# Altium PCB SiLPA.PcbDoc (part 4 of 10)
Units mm, origin at the board's own origin, x right, y up, seen from the top; angles counter-clockwise.
Board outline 222.36 x 100 mm, 4 copper layers (L1, P2, L3, L4), stack 1.598 mm thick; 583 components, 330 nets, 1692 pads, 1781 vias.
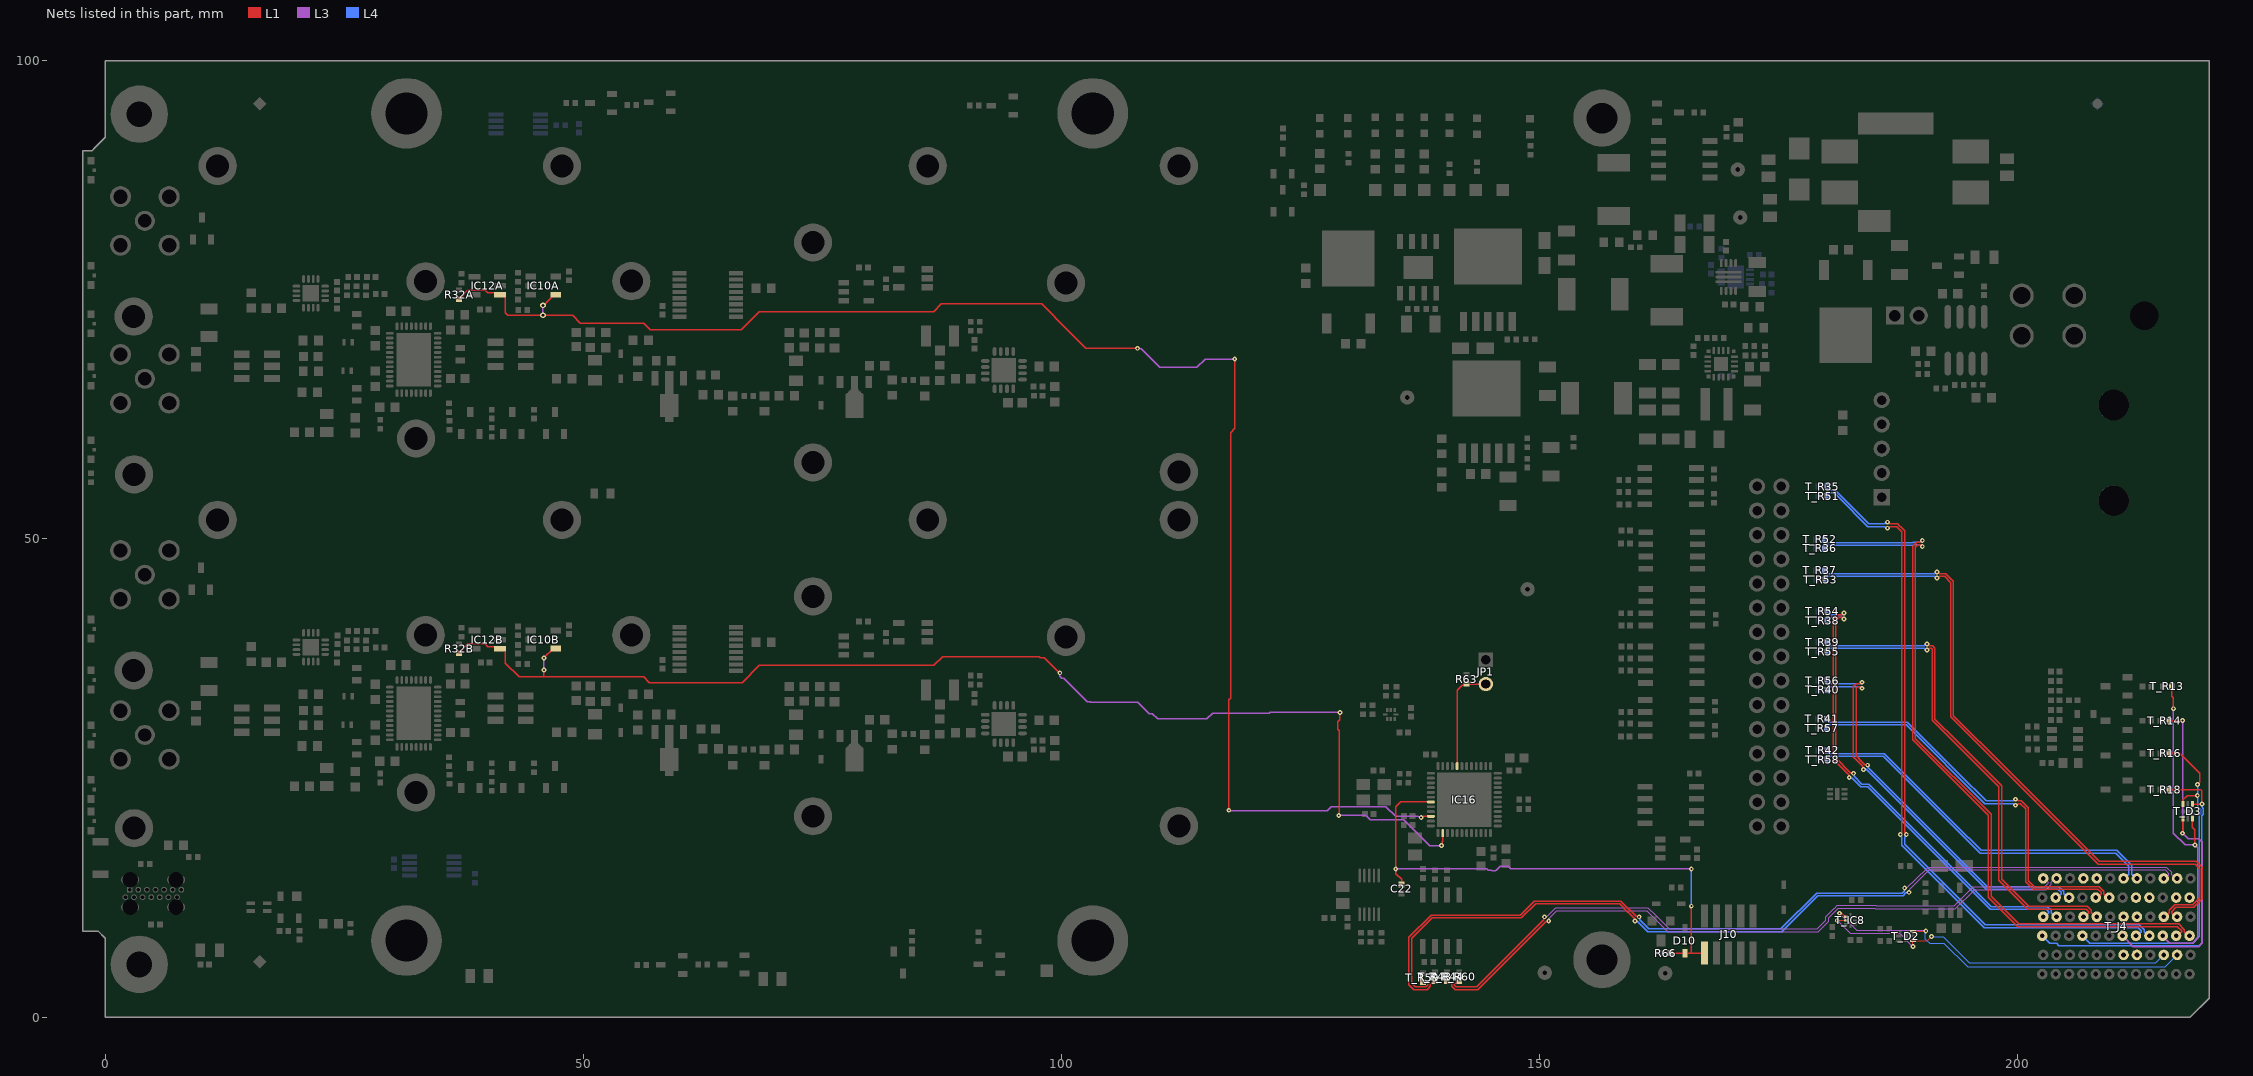
[diagram p5: the nets of this part, all layers, seen from the top]

## Part data (continued)
R25A R25B: library part R0603_0R_JUMPER, "Resistor", Case=0603, MANUFACTURER=GENERIC, Manufacturer1 ComponentHeight=0.55mm, Manufacturer1 Example="NIC COMPONENT", Manufacturer1 Part Number=NRC06Z0, Author="CERN DEM JLC", Component Type=Standard, CreateDate=03/12/2007, HelpURL=\\cern.ch\dfs\Applications\Altium\Datasheets\R0603_NIC_NRC.pdf, LatestRevisionDate=13/03/2008, Manufacturer Part Number=R0603_0R_JUMPER, Mounted=Yes, Part Description="1A (0.05R Max DC Resistance) Zero Ohm Jumper", Part Number=R0603_0R_JUMPER, Pin Count=2, PressFit=No, Sense=No, SMD=Yes, Socket=No, Status=Preferred
R27A R27B: library part R0603_82R_1%_0.1W_100PPM, "Resistor - 1%", Case=0603, MANUFACTURER=GENERIC, Manufacturer1 ComponentHeight=0.55mm, Manufacturer1 Example="NIC COMPONENT", Manufacturer1 Part Number=NRC06F82R0TRF, Power=0.1W, Tolerance=±1%, Author="CERN DEM JLC", Component Type=Standard, CreateDate=03.12.2007, HelpURL=\\cern.ch\dfs\Applications\Altium\Datasheets\R0603_NIC_NRC.pdf, LatestRevisionDate=13.03.2008, Manufacturer Part Number=R0603_82R_1%_0.1W_100PPM, Mounted=Yes, Part Description="General Purpose Thick Film Chip Resistor", Part Number=R0603_82R_1%_0.1W_100PPM, Pin Count=2, PressFit=No, Sense=No, SMD=Yes, Socket=No, Status=Preferred, TC=±100ppm/°C
R28: library part R0603_56K_1%_0.1W_100PPM, "Resistor - 1%", Case=0603, MANUFACTURER=GENERIC, Manufacturer1 ComponentHeight=0.55mm, Manufacturer1 Example="NIC COMPONENT", Manufacturer1 Part Number=NRC06F5602TRF, Power=0.1W, Tolerance=±1%, Author="CERN DEM JLC", Component Type=Standard, CreateDate=03.12.2007, HelpURL=\\cern.ch\dfs\Applications\Altium\Datasheets\R0603_NIC_NRC.pdf, LatestRevisionDate=13.03.2008, Manufacturer Part Number=R0603_56K_1%_0.1W_100PPM, Mounted=Yes, Part Description="General Purpose Thick Film Chip Resistor", Part Number=R0603_56K_1%_0.1W_100PPM, Pin Count=2, PressFit=No, Sense=No, SMD=Yes, Socket=No, Status=Preferred, TC=±100ppm/°C
R29A R29B: library part R0402_2K4_1%_0.0625W_100PPM, "Resistor - 1%", Case=0402, MANUFACTURER=GENERIC, Manufacturer1 ComponentHeight=0.4mm, Manufacturer1 Example="YAGEO PHYCOMP", Manufacturer1 Part Number=232270672402L, Power=0.0625W, Tolerance=±1%, Author="CERN DEM JLC", Component Type=Standard, CreateDate=03.12.2007, HelpURL=\\cern.ch\dfs\Applications\Altium\Datasheets\R0402_Phycomp_RC0402.pdf, LatestRevisionDate=17.10.2012, Manufacturer Part Number=R0402_2K4_1%_0.0625W_100PPM, Mounted=Yes, Part Description="General Purpose Thick Film Chip Resistor", Part Number=R0402_2K4_1%_0.0625W_100PPM, Pin Count=2, PressFit=No, Sense=No, SMD=Yes, Socket=No, Status="Not Recommended", TC=±100ppm/°C
R30: library part R0603_8k2_1%_0.1W_100PPM, "Resistor - 1%", Case=0603, MANUFACTURER=GENERIC, Manufacturer1 ComponentHeight=0.55mm, Manufacturer1 Example="NIC COMPONENT", Manufacturer1 Part Number=NRC06F8201TRF, Manufacturer Part Number=R0603_8K2_1%_0.1W_100PPM, Power=0.1W, Tolerance=±1%, Author="CERN DEM JLC", Component Type=Standard, CreateDate=03.12.2007, HelpURL=\\cern.ch\dfs\Applications\Altium\Datasheets\R0603_NIC_NRC.pdf, LatestRevisionDate=13.03.2008, Mounted=Yes, Part Description="General Purpose Thick Film Chip Resistor", Part Number=R0603_8K2_1%_0.1W_100PPM, Pin Count=2, PressFit=No, Sense=No, SMD=Yes, Socket=No, Status=Preferred, TC=±100ppm/°C
R31A R31B: library part R0402_3R9_1%_0.0625W_200PPM, "Resistor - 1%", Case=0402, MANUFACTURER=GENERIC, Manufacturer1 ComponentHeight=0.4mm, Manufacturer1 Example="YAGEO PHYCOMP", Manufacturer1 Part Number=232270673908L, Power=0.0625W, Tolerance=±1%, Author="CERN DEM JLC", Component Type=Standard, CreateDate=03.12.2007, HelpURL=\\cern.ch\dfs\Applications\Altium\Datasheets\R0402_Phycomp_RC0402.pdf, LatestRevisionDate=17.10.2012, Manufacturer Part Number=R0402_3R9_1%_0.0625W_200PPM, Mounted=Yes, Part Description="General Purpose Thick Film Chip Resistor", Part Number=R0402_3R9_1%_0.0625W_200PPM, Pin Count=2, PressFit=No, Sense=No, SMD=Yes, Socket=No, Status="Not Recommended", TC=±200ppm/°C
R33A R33B: library part R0402_20k_1%_0.0625W_100PPM, "Resistor - 1%", Case=0402, MANUFACTURER=GENERIC, Manufacturer1 ComponentHeight=0.4mm, Manufacturer1 Example="YAGEO PHYCOMP", Manufacturer1 Part Number=232270672003L, Manufacturer Part Number=R0402_20K_1%_0.0625W_100PPM, Power=0.0625W, Tolerance=±1%, Author="CERN DEM JLC", Component Type=Standard, CreateDate=03.12.2007, HelpURL=\\cern.ch\dfs\Applications\Altium\Datasheets\R0402_Phycomp_RC0402.pdf, LatestRevisionDate=17.10.2012, Mounted=Yes, Part Description="General Purpose Thick Film Chip Resistor", Part Number=R0402_20K_1%_0.0625W_100PPM, Pin Count=2, PressFit=No, Sense=No, SMD=Yes, Socket=No, Status="Not Recommended", TC=±100ppm/°C
R40 R82: library part R0402_27K_1%_0.0625W_100PPM, "Resistor - 1%", Case=0402, MANUFACTURER=GENERIC, Manufacturer1 ComponentHeight=0.4mm, Manufacturer1 Example="YAGEO PHYCOMP", Manufacturer1 Part Number=232270672703L, Power=0.0625W, Tolerance=±1%, Author="CERN DEM JLC", Component Type=Standard, CreateDate=03.12.2007, HelpURL=\\cern.ch\dfs\Applications\Altium\Datasheets\R0402_Phycomp_RC0402.pdf, LatestRevisionDate=17.10.2012, Manufacturer Part Number=R0402_27K_1%_0.0625W_100PPM, Mounted=Yes, Part Description="General Purpose Thick Film Chip Resistor", Part Number=R0402_27K_1%_0.0625W_100PPM, Pin Count=2, PressFit=No, Sense=No, SMD=Yes, Socket=No, Status="Not Recommended", TC=±100ppm/°C
R48: library part R0402_3K3_1%_0.0625W_100PPM, "Resistor - 1%", Case=0402, MANUFACTURER=GENERIC, Manufacturer1 ComponentHeight=0.4mm, Manufacturer1 Example="YAGEO PHYCOMP", Manufacturer1 Part Number=232270673302L, Power=0.0625W, Tolerance=±1%, Author="CERN DEM JLC", Component Type=Standard, CreateDate=03.12.2007, HelpURL=\\cern.ch\dfs\Applications\Altium\Datasheets\R0402_Phycomp_RC0402.pdf, LatestRevisionDate=17.10.2012, Manufacturer Part Number=R0402_3K3_1%_0.0625W_100PPM, Mounted=Yes, Part Description="General Purpose Thick Film Chip Resistor", Part Number=R0402_3K3_1%_0.0625W_100PPM, Pin Count=2, PressFit=No, Sense=No, SMD=Yes, Socket=No, Status="Not Recommended", TC=±100ppm/°C
R49: library part R0402_75K_1%_0.0625W_100PPM, "Resistor - 1%", Case=0402, MANUFACTURER=GENERIC, Manufacturer1 ComponentHeight=0.4mm, Manufacturer1 Example="YAGEO PHYCOMP", Manufacturer1 Part Number=232270677503L, Power=0.0625W, Tolerance=±1%, Author="CERN DEM JLC", Component Type=Standard, CreateDate=03.12.2007, HelpURL=\\cern.ch\dfs\Applications\Altium\Datasheets\R0402_Phycomp_RC0402.pdf, LatestRevisionDate=17.10.2012, Manufacturer Part Number=R0402_75K_1%_0.0625W_100PPM, Mounted=Yes, Part Description="General Purpose Thick Film Chip Resistor", Part Number=R0402_75K_1%_0.0625W_100PPM, Pin Count=2, PressFit=No, Sense=No, SMD=Yes, Socket=No, Status="Not Recommended", TC=±100ppm/°C
R50: library part R0402_15K_1%_0.0625W_100PPM, "Resistor - 1%", Case=0402, MANUFACTURER=GENERIC, Manufacturer1 ComponentHeight=0.4mm, Manufacturer1 Example=VISHAY, Manufacturer1 Part Number=CRCW040215K0FK, Power=0.0625W, Tolerance=±1%, Author="CERN DEM JMW", Component Type=Standard, CreateDate=06.07.2015, HelpURL="\\cern.ch\dfs\Applications\Altium\Datasheets\R0402_VISHAY_CRCW e3.pdf", LatestRevisionDate=06.07.2015, Manufacturer Part Number=R0402_15K_1%_0.0625W_100PPM, Mounted=Yes, Part Description="General Purpose Thick Film Chip Resistor", Part Number=R0402_15K_1%_0.0625W_100PPM, Pin Count=2, PressFit=No, Sense=No, SMD=Yes, Socket=No, Status=None, TC=±100ppm/°C
R51: library part R0603_100K_1%_0.1W_100PPM, "Resistor - 1%", Case=0603, MANUFACTURER=GENERIC, Manufacturer1 ComponentHeight=0.55mm, Manufacturer1 Example="NIC COMPONENT", Manufacturer1 Part Number=NRC06F1003TRF, Power=0.1W, Tolerance=±1%, Author="CERN DEM JLC", Component Type=Standard, CreateDate=2007-12-03, HelpURL=\\cern.ch\dfs\Applications\Altium\Datasheets\R0603_NIC_NRC.pdf, LatestRevisionDate=2008-03-13, Manufacturer Part Number=R0603_100K_1%_0.1W_100PPM, Mounted=Yes, Part Description="General Purpose Thick Film Chip Resistor", Part Number=R0603_100K_1%_0.1W_100PPM, Pin Count=2, Sense=No, SMD=Yes, Socket=No, Status=Preferred, TC=±100ppm/°C
R52A R52B R60A R60B: library part R0402_82R_1%_0.0625W_100PPM, "Resistor - 1%", Case=0402, MANUFACTURER=GENERIC, Manufacturer1 ComponentHeight=0.4mm, Manufacturer1 Example="YAGEO PHYCOMP", Manufacturer1 Part Number=232270678209L, Power=0.0625W, Tolerance=±1%, Author="CERN DEM JLC", Component Type=Standard, CreateDate=03.12.2007, HelpURL=\\cern.ch\dfs\Applications\Altium\Datasheets\R0402_Phycomp_RC0402.pdf, LatestRevisionDate=17.10.2012, Manufacturer Part Number=R0402_82R_1%_0.0625W_100PPM, Mounted=Yes, Part Description="General Purpose Thick Film Chip Resistor", Part Number=R0402_82R_1%_0.0625W_100PPM, Pin Count=2, PressFit=No, Sense=No, SMD=Yes, Socket=No, Status="Not Recommended", TC=±100ppm/°C
R56 R104 T_R29: library part R0402_100K_1%_0.0625W_100PPM, "Resistor - 1%", Case=0402, MANUFACTURER=GENERIC, Manufacturer1 ComponentHeight=0.4mm, Manufacturer1 Example="YAGEO PHYCOMP", Manufacturer1 Part Number=232270671004L, Power=0.0625W, Tolerance=±1%, Author="CERN DEM JLC", Component Type=Standard, CreateDate=03.12.2007, HelpURL=\\cern.ch\dfs\Applications\Altium\Datasheets\R0402_Phycomp_RC0402.pdf, LatestRevisionDate=17.10.2012, Manufacturer Part Number=R0402_100K_1%_0.0625W_100PPM, Mounted=Yes, Part Description="General Purpose Thick Film Chip Resistor", Part Number=R0402_100K_1%_0.0625W_100PPM, Pin Count=2, PressFit=No, Sense=No, SMD=Yes, Socket=No, Status="Not Recommended", TC=±100ppm/°C
R57: library part R0402_33K_1%_0.0625W_100PPM, "Resistor - 1%", Case=0402, MANUFACTURER=GENERIC, Manufacturer1 ComponentHeight=0.4mm, Manufacturer1 Example="YAGEO PHYCOMP", Manufacturer1 Part Number=232270673303L, Power=0.0625W, Tolerance=±1%, Author="CERN DEM JLC", Component Type=Standard, CreateDate=03.12.2007, HelpURL=\\cern.ch\dfs\Applications\Altium\Datasheets\R0402_Phycomp_RC0402.pdf, LatestRevisionDate=17.10.2012, Manufacturer Part Number=R0402_33K_1%_0.0625W_100PPM, Mounted=Yes, Part Description="General Purpose Thick Film Chip Resistor", Part Number=R0402_33K_1%_0.0625W_100PPM, Pin Count=2, PressFit=No, Sense=No, SMD=Yes, Socket=No, Status="Not Recommended", TC=±100ppm/°C
R58: library part R0402_22K_1%_0.0625W_100PPM, "Resistor - 1%", Case=0402, MANUFACTURER=GENERIC, Manufacturer1 ComponentHeight=0.4mm, Manufacturer1 Example="YAGEO PHYCOMP", Manufacturer1 Part Number=232270672203L, Power=0.0625W, Tolerance=±1%, Author="CERN DEM JLC", Component Type=Standard, CreateDate=03.12.2007, HelpURL=\\cern.ch\dfs\Applications\Altium\Datasheets\R0402_Phycomp_RC0402.pdf, LatestRevisionDate=17.10.2012, Manufacturer Part Number=R0402_22K_1%_0.0625W_100PPM, Mounted=Yes, Part Description="General Purpose Thick Film Chip Resistor", Part Number=R0402_22K_1%_0.0625W_100PPM, Pin Count=2, PressFit=No, Sense=No, SMD=Yes, Socket=No, Status="Not Recommended", TC=±100ppm/°C
R59A R59B: library part R0402_1K2_1%_0.0625W_100PPM, "Resistor - 1%", Case=0402, MANUFACTURER=GENERIC, Manufacturer1 ComponentHeight=0.4mm, Manufacturer1 Example="YAGEO PHYCOMP", Manufacturer1 Part Number=232270671202L, Power=0.0625W, Tolerance=±1%, Author="CERN DEM JLC", Component Type=Standard, CreateDate=03.12.2007, HelpURL=\\cern.ch\dfs\Applications\Altium\Datasheets\R0402_Phycomp_RC0402.pdf, LatestRevisionDate=17.10.2012, Manufacturer Part Number=R0402_1K2_1%_0.0625W_100PPM, Mounted=Yes, Part Description="General Purpose Thick Film Chip Resistor", Part Number=R0402_1K2_1%_0.0625W_100PPM, Pin Count=2, PressFit=No, Sense=No, SMD=Yes, Socket=No, Status="Not Recommended", TC=±100ppm/°C
R69: library part R0603_24K_1%_0.1W_100PPM, "Resistor - 1%", Case=0603, MANUFACTURER=GENERIC, Manufacturer1 ComponentHeight=0.55mm, Manufacturer1 Example="NIC COMPONENT", Manufacturer1 Part Number=NRC06F2402TRF, Power=0.1W, Tolerance=±1%, Author="CERN DEM JLC", Component Type=Standard, CreateDate=03.12.2007, HelpURL=\\cern.ch\dfs\Applications\Altium\Datasheets\R0603_NIC_NRC.pdf, LatestRevisionDate=13.03.2008, Manufacturer Part Number=R0603_24K_1%_0.1W_100PPM, Mounted=Yes, Part Description="General Purpose Thick Film Chip Resistor", Part Number=R0603_24K_1%_0.1W_100PPM, Pin Count=2, Sense=No, SMD=Yes, Socket=No, Status=Preferred, TC=±100ppm/°C
R73A R73B: library part R1206_1K_1%_0.25W_100PPM, "Resistor - 1%", Case=1206, MANUFACTURER=GENERIC, Manufacturer1 ComponentHeight=0.65mm, Manufacturer1 Example="NIC COMPONENT", Manufacturer1 Part Number=NRC12F1001TRF, Power=0.25W, Tolerance=±1%, Author="CERN DEM JLC", Component Type=Standard, CreateDate=03.12.2007, HelpURL=\\cern.ch\dfs\Applications\Altium\Datasheets\R1206_NIC_NRC.pdf, LatestRevisionDate=13.03.2008, Manufacturer Part Number=R1206_1K_1%_0.25W_100PPM, Mounted=Yes, Part Description="General Purpose Thick Film Chip Resistor", Part Number=R1206_1K_1%_0.25W_100PPM, Pin Count=2, PressFit=No, Sense=No, SMD=Yes, Socket=No, Status=Preferred, TC=±100ppm/°C
R75 R76 R77 R78: library part R0402_2K2_1%_0.0625W_100PPM, "Resistor - 1%", Case=0402, MANUFACTURER=GENERIC, Manufacturer1 ComponentHeight=0.4mm, Manufacturer1 Example="YAGEO PHYCOMP", Manufacturer1 Part Number=232270672202L, Power=0.0625W, Tolerance=±1%, Author="CERN DEM JLC", Component Type=Standard, CreateDate=03.12.2007, HelpURL=\\cern.ch\dfs\Applications\Altium\Datasheets\R0402_Phycomp_RC0402.pdf, LatestRevisionDate=17.10.2012, Manufacturer Part Number=R0402_2K2_1%_0.0625W_100PPM, Mounted=Yes, Part Description="General Purpose Thick Film Chip Resistor", Part Number=R0402_2K2_1%_0.0625W_100PPM, Pin Count=2, Sense=No, SMD=Yes, Socket=No, Status="Not recommended", TC=±100ppm/°C
R80 R98: library part R0402_24K_1%_0.0625W_100PPM, "Resistor - 1%", Case=0402, MANUFACTURER=GENERIC, Manufacturer1 ComponentHeight=0.4mm, Manufacturer1 Example="YAGEO PHYCOMP", Manufacturer1 Part Number=232270672403L, Power=0.0625W, Tolerance=±1%, Author="CERN DEM JLC", Component Type=Standard, CreateDate=03.12.2007, HelpURL=\\cern.ch\dfs\Applications\Altium\Datasheets\R0402_Phycomp_RC0402.pdf, LatestRevisionDate=17.10.2012, Manufacturer Part Number=R0402_24K_1%_0.0625W_100PPM, Mounted=Yes, Part Description="General Purpose Thick Film Chip Resistor", Part Number=R0402_24K_1%_0.0625W_100PPM, Pin Count=2, PressFit=No, Sense=No, SMD=Yes, Socket=No, Status="Not Recommended", TC=±100ppm/°C
R81 T_R30: library part R0402_3K9_1%_0.0625W_100PPM, "Resistor - 1%", Case=0402, MANUFACTURER=GENERIC, Manufacturer1 ComponentHeight=0.4mm, Manufacturer1 Example="YAGEO PHYCOMP", Manufacturer1 Part Number=232270673902L, Power=0.0625W, Tolerance=±1%, Author="CERN DEM JLC", Component Type=Standard, CreateDate=03.12.2007, HelpURL=\\cern.ch\dfs\Applications\Altium\Datasheets\R0402_Phycomp_RC0402.pdf, LatestRevisionDate=17.10.2012, Manufacturer Part Number=R0402_3K9_1%_0.0625W_100PPM, Mounted=Yes, Part Description="General Purpose Thick Film Chip Resistor", Part Number=R0402_3K9_1%_0.0625W_100PPM, Pin Count=2, PressFit=No, Sense=No, SMD=Yes, Socket=No, Status="Not Recommended", TC=±100ppm/°C
R83: library part R0402_3K_1%_0.0625W_100PPM, "Resistor - 1%", Case=0402, MANUFACTURER=GENERIC, Manufacturer1 ComponentHeight=0.4mm, Manufacturer1 Example="YAGEO PHYCOMP", Manufacturer1 Part Number=232270673002L, Power=0.0625W, Tolerance=±1%, Author="CERN DEM JLC", Component Type=Standard, CreateDate=03.12.2007, HelpURL=\\cern.ch\dfs\Applications\Altium\Datasheets\R0402_Phycomp_RC0402.pdf, LatestRevisionDate=17.10.2012, Manufacturer Part Number=R0402_3K_1%_0.0625W_100PPM, Mounted=Yes, Part Description="General Purpose Thick Film Chip Resistor", Part Number=R0402_3K_1%_0.0625W_100PPM, Pin Count=2, PressFit=No, Sense=No, SMD=Yes, Socket=No, Status="Not Recommended", TC=±100ppm/°C
R91: library part R0805_4R7_1%_0.125W_200PPM, "Resistor - 1%", Case=0805, MANUFACTURER=GENERIC, Manufacturer1 ComponentHeight=0.65mm, Manufacturer1 Example="YAGEO PHYCOMP", Manufacturer1 Part Number="232273464708L or RC0805FR-074R7L", Power=0.125W, Tolerance=±1%, Author="CERN DEM JLC", Component Type=Standard, CreateDate=03.12.2007, HelpURL=\\cern.ch\dfs\Applications\Altium\Datasheets\R0805_Phycomp_RC0805.pdf, LatestRevisionDate=17.10.2012, Manufacturer Part Number=R0805_4R7_1%_0.125W_200PPM, Mounted=Yes, Part Description="General Purpose Thick Film Chip Resistor", Part Number=R0805_4R7_1%_0.125W_200PPM, Pin Count=2, PressFit=No, Sense=No, SMD=Yes, Socket=No, Status=Preferred, TC=±200ppm/°C
R94 R95: library part R0402_5K1_1%_0.0625W_100PPM, "Resistor - 1%", Case=0402, MANUFACTURER=GENERIC, Manufacturer1 ComponentHeight=0.4mm, Manufacturer1 Example="YAGEO PHYCOMP", Manufacturer1 Part Number=232270675102L, Power=0.0625W, Tolerance=±1%, Author="CERN DEM JLC", Component Type=Standard, CreateDate=03.12.2007, HelpURL=\\cern.ch\dfs\Applications\Altium\Datasheets\R0402_Phycomp_RC0402.pdf, LatestRevisionDate=17.10.2012, Manufacturer Part Number=R0402_5K1_1%_0.0625W_100PPM, Mounted=Yes, Part Description="General Purpose Thick Film Chip Resistor", Part Number=R0402_5K1_1%_0.0625W_100PPM, Pin Count=2, PressFit=No, Sense=No, SMD=Yes, Socket=No, Status="Not Recommended", TC=±100ppm/°C
R99: library part R0402_0.1R_1%_0.0625W_100PPM, "Resistor - 1%", Case=0402, MANUFACTURER=GENERIC, Manufacturer1 ComponentHeight=0.4mm, Manufacturer1 Example="YAGEO PHYCOMP", Manufacturer1 Part Number=232270671007L, Power=0.0625W, Tolerance=±1%, Author="CERN DEM MR", Component Type=Standard, CreateDate=15.03.2016, HelpURL=\\cern.ch\dfs\Applications\Altium\Datasheets\R0402_Phycomp_RC0402.pdf, LatestRevisionDate=15.03.2016, Manufacturer Part Number=R0402_0.1R_1%_0.0625W_100PPM, Mounted=Yes, Part Description="General Purpose Thick Film Chip Resistor", Part Number=R0402_0.1R_1%_0.0625W_100PPM, Pin Count=2, PressFit=No, Sense=No, SMD=Yes, Socket=No, Status="Not Recommended", TC=±100ppm/°C
R100: library part R0402_13K_1%_0.0625W_100PPM, "Resistor - 1%", Case=0402, MANUFACTURER=GENERIC, Manufacturer1 ComponentHeight=0.4mm, Manufacturer1 Example="YAGEO PHYCOMP", Manufacturer1 Part Number=232270671303L, Power=0.0625W, Tolerance=±1%, Author="CERN DEM JLC", Component Type=Standard, CreateDate=03.12.2007, HelpURL=\\cern.ch\dfs\Applications\Altium\Datasheets\R0402_Phycomp_RC0402.pdf, LatestRevisionDate=17.10.2012, Manufacturer Part Number=R0402_13K_1%_0.0625W_100PPM, Mounted=Yes, Part Description="General Purpose Thick Film Chip Resistor", Part Number=R0402_13K_1%_0.0625W_100PPM, Pin Count=2, PressFit=No, Sense=No, SMD=Yes, Socket=No, Status="Not Recommended", TC=±100ppm/°C
R101: library part R0402_47K_1%_0.0625W_100PPM, "Resistor - 1%", Case=0402, MANUFACTURER=GENERIC, Manufacturer1 ComponentHeight=0.4mm, Manufacturer1 Example="YAGEO PHYCOMP", Manufacturer1 Part Number=232270674703L, Power=0.0625W, Tolerance=±1%, Author="CERN DEM JLC", Component Type=Standard, CreateDate=03.12.2007, HelpURL=\\cern.ch\dfs\Applications\Altium\Datasheets\R0402_Phycomp_RC0402.pdf, LatestRevisionDate=17.10.2012, Manufacturer Part Number=R0402_47K_1%_0.0625W_100PPM, Mounted=Yes, Part Description="General Purpose Thick Film Chip Resistor", Part Number=R0402_47K_1%_0.0625W_100PPM, Pin Count=2, PressFit=No, Sense=No, SMD=Yes, Socket=No, Status="Not Recommended", TC=±100ppm/°C
R102: library part R0402_2K_1%_0.0625W_100PPM, "Resistor - 1%", Case=0402, MANUFACTURER=GENERIC, Manufacturer1 ComponentHeight=0.4mm, Manufacturer1 Example="YAGEO PHYCOMP", Manufacturer1 Part Number=232270672002L, Power=0.0625W, Tolerance=±1%, Author="CERN DEM JLC", Component Type=Standard, CreateDate=03.12.2007, HelpURL=\\cern.ch\dfs\Applications\Altium\Datasheets\R0402_Phycomp_RC0402.pdf, LatestRevisionDate=17.10.2012, Manufacturer Part Number=R0402_2K_1%_0.0625W_100PPM, Mounted=Yes, Part Description="General Purpose Thick Film Chip Resistor", Part Number=R0402_2K_1%_0.0625W_100PPM, Pin Count=2, PressFit=No, Sense=No, SMD=Yes, Socket=No, Status="Not Recommended", TC=±100ppm/°C
R103: library part R0402_1K5_1%_0.0625W_100PPM, "Resistor - 1%", Case=0402, MANUFACTURER=GENERIC, Manufacturer1 ComponentHeight=0.4mm, Manufacturer1 Example="YAGEO PHYCOMP", Manufacturer1 Part Number=232270671502L, Power=0.0625W, Tolerance=±1%, Author="CERN DEM JLC", Component Type=Standard, CreateDate=03.12.2007, HelpURL=\\cern.ch\dfs\Applications\Altium\Datasheets\R0402_Phycomp_RC0402.pdf, LatestRevisionDate=17.10.2012, Manufacturer Part Number=R0402_1K5_1%_0.0625W_100PPM, Mounted=Yes, Part Description="General Purpose Thick Film Chip Resistor", Part Number=R0402_1K5_1%_0.0625W_100PPM, Pin Count=2, PressFit=No, Sense=No, SMD=Yes, Socket=No, Status="Not Recommended", TC=±100ppm/°C
R106 R216: library part R0603_3k3_1%_0.1W_100PPM, "Resistor - 1%", Case=0603, MANUFACTURER=GENERIC, Manufacturer1 ComponentHeight=0.55mm, Manufacturer1 Example="NIC COMPONENT", Manufacturer1 Part Number=NRC06F3301TRF, Manufacturer Part Number=R0603_3K3_1%_0.1W_100PPM, Power=0.1W, Tolerance=±1%, Author="CERN DEM JLC", Component Type=Standard, CreateDate=03.12.2007, HelpURL=\\cern.ch\dfs\Applications\Altium\Datasheets\R0603_NIC_NRC.pdf, LatestRevisionDate=13.03.2008, Mounted=Yes, Part Description="General Purpose Thick Film Chip Resistor", Part Number=R0603_3K3_1%_0.1W_100PPM, Pin Count=2, PressFit=No, Sense=No, SMD=Yes, Socket=No, Status=Preferred, TC=±100ppm/°C
RT1: library part THERM_NTC_100K_VISHAY_NTCS0603E3104FXT, "Thermistor NTC (Negative Temperature Coefficient)", Case=0603, MANUFACTURER=VISHAY, Manufacturer Part Number=NTCS0603E3104FXT, Power=125mW, Tolerance=±1%, Author="CERN DEM JMW", Component Type=Standard, ComponentHeight=0.95mm, CreateDate=26.11.2019, HelpURL=\\cern.ch\dfs\Applications\Altium\Datasheets\THERM_VISHAY_NTCS0603E3.pdf, LatestRevisionDate=26.11.2019, Mounted=Yes, Part Description="SMD 0603, Glass Protected NTC Thermistor", Part Number=THERM_NTC_100K_VISHAY_NTCS0603E3104FXT, Pin Count=2, Sense=No, SMD=Yes, Socket=No, Status=None
S1 S2 S3 S4: library part "WA-SMSI,  9774140360", "WA-SMSI SMD Steel Spacer with internal Thread", MANUFACTURER="Wurth Elektronik", ComponentLink1Description=Manufacturer, ComponentLink1URL=http://www.we-online.de, ComponentLink2Description=Datasheet, ComponentLink2URL=http://katalog.we-online.de/em/datasheet/9774140360.pdf, Created by="Baojun Chen", Created Date=20.Oct.2015, partNo=9774140360
SCREW1A SCREW1B SCREW2A SCREW2B SCREW3A SCREW3B SCREW4A SCREW4B SCREW5A SCREW5B SCREW6A SCREW6B SCREW7A SCREW7B SCREW8A SCREW8B SCREW9A SCREW9B SCREW10A SCREW10B SCREW11A SCREW11B SCREW12A SCREW12B SCREW13A SCREW13B: library part BOSSARD_BN5687-3061579_v, "Screw", MANUFACTURER=BOSSARD, Manufacturer Part Number="BN5687 Art.3061579", Author="CERN DEM JLC", Component Type=Mechanical, ComponentHeight=5.6mm, CreateDate=01.11.2018, HelpURL=\\cern.ch\dfs\Applications\Altium\Datasheets\BOSSARD_BN5687-3061579.pdf, LatestRevisionDate=01.11.2018, Mounted=Yes, PackageDescription="M2 L=4mm Hexalobular Socket Pan Head Screw, Fully Threaded - Stainless Steel A2", Part Description="M2 L=4mm Hexalobular Socket Pan Head Screw, Fully Threaded, Stainless Steel A2", Part Number=BOSSARD_BN5687-3061579_v, Pin Count=0, PressFit=No, Sense=No, SMD=No, Socket=No, Status=None
SW1: library part CMP-08834-000057-1, "SWITCH TACTILE SPST-NO 0.05A 12V", Case/Package=SMD/SMT, Contact Resistance=100mR, Current Rating=50mA, Max Operating Temperature=70°C, Max Voltage Rating (DC)=12V, Min Operating Temperature=-25°C, Operating Force=1.59N, Package Quantity=1000, Ratings="Dust Proof", Actuator Length=0.7mm, Connector Type=SMD/SMT, Depth=3.2mm, Electrical Life=100000Cycles, Illumination Type=Non-Illuminated, Length=4mm, Max Current Rating=50mA, Mechanical Life=100000Cycles, Mount="Surface Mount", Orientation="Right Angle", Packaging="Tape and Reel", RoHS Compliant=Yes, Series=B3U, Switch Function=Off-Mom, Switch Travel=0.2mm, Termination="Gull Wing", Throw Configuration=SPST, Voltage Rating (DC)=12V, Weight=0.022g
T1 T2 T3 T4 T9 T10 T11 T12: "N-CHANNEL MOSFET WITH DIODE", Case=SOT23-3, MANUFACTURER=NEXPERIA, Author="CERN DEM JLC", Bonding=No, Component Type=Standard, ComponentHeight=1.1mm, CreateDate=16.03.2010, Device=BSH103, HelpURL=\\cern.ch\dfs\Applications\Altium\Datasheets\BSH103.pdf, LatestRevisionDate=20.06.2017, Manufacturer Part Number=BSH103, Mounted=Yes, PackageDescription="SOT23, 0.95mm Pitch; 3 Pin, 1.30mm W X 2.90mm L X 1.10mm H body, IPC Medium Density", Part Description="30V, 850mA N-Channel Enhancement Mode Field-Effect Transistor", Part Number=BSH103, Pin Count=3, PressFit=No, Sense=No, SMD=Yes, Socket=No
T6A T6B T7A T7B T8A T8B T14 T17: "N-CHANNEL MOSFET WITH DIODE", Case=SOT23-3, MANUFACTURER="ON SEMICONDUCTOR", Author="CERN DEM JLC", Bonding=No, Component Type=Standard, ComponentHeight=1.11mm, CreateDate=23.03.2009, Device=BSS138LT1G, HelpURL=\\cern.ch\dfs\Applications\Altium\Datasheets\BSS138LT1G.pdf, LatestRevisionDate=23.03.2009, Manufacturer Part Number=BSS138LT1G, Mounted=Yes, Part Description="50V 200mA N-Channel Enhancement Mode Field-Effect Transistor", Part Number=BSS138LT1G, Pin Count=3, PressFit=No, Sense=No, SMD=Yes, Socket=No
  T6A T6B T7A T7B T8A T8B T14: PackageDescription="SOT23, 0.95mm Pitch; 3 Pin, 1.40mm W X 3.00mm L X 1.10mm H body, IPC Medium Density"
  T17: PackageDescription="SOT23 3-Leads, Pitch 0.95mm - Body 1.4x3mm, IPC Medium Density"
T13: "-30V -19.7A P-Channel MOSFET", Case=SOIC8, MANUFACTURER="VISHAY SILICONIX", Author="CERN DEM MR", Bonding=No, Component Type=Standard, ComponentHeight=1.75mm, CreateDate=05/10/2016, Device=SI4425DDY-T1-GE3, HelpURL=\\cern.ch\dfs\Applications\Altium\Datasheets\SI4425DDY-T1-GE3.pdf, LatestRevisionDate=05/10/2016, Manufacturer Part Number=SI4425DDY-T1-GE3, Mounted=Yes, PackageDescription="SOIC 8, Pitch 1.27mm - Body 4x5mm, IPC Medium Density", Part Description="-30V -19.7A P-Channel MOSFET", Part Number=SI4425DDY-T1-GE3, Pin Count=8, PressFit=No, Sense=No, SMD=Yes, Socket=No
T_B1 T_B2 T_B3 T_B4 T_B5 T_B6: library part PLATED_HOLE0.5_PAD1.5, "Single Terminal Socket", Author="CERN DEM MR", Component Type="Standard (No BOM)", ComponentHeight=0mm, CreateDate=12.10.2017, Family="Plated Hole", HelpURL=Undefined, LatestRevisionDate=12.10.2017, Mounted=No, PackageDescription="Plated Through Hole: Hole Dia.=0.5mm Pad Dia.=1.5mm", Part Description="Plated Through Hole: Hole Dia.=0.5mm Pad Dia.=1.5mm", Part Number=PLATED_HOLE0.5_PAD1.5, Pin Count=1, Sense=No, SMD=No, Socket=No, Status=None
T_B7 T_B8: library part PLATED_HOLE2.7_PAD6.0, "Single Terminal Socket", Author="CERN DEM HF", Component Type="Standard (No BOM)", ComponentHeight=0mm, CreateDate=28.08.2024, Family="Plated Hole", HelpURL=Undefined, LatestRevisionDate=28.08.2024, Mounted=No, PackageDescription="Plated Through Hole: Hole Dia.=2.7mm Pad Dia.=6.0mm", Part Description="Plated Through Hole: Hole Dia.=2.7mm Pad Dia.=6.0mm", Part Number=PLATED_HOLE2.7_PAD6.0, Pin Count=1, Sense=No, SMD=No, Socket=No, Status=None
T_C2: library part CTE3216-18_4.7UF_10V_10%_AVX_TPSA475K010T1400, "Polarised capacitor", Case=A, MANUFACTURER=AVX, Manufacturer Part Number=TPSA475K010T1400, Tolerance=±10%, Voltage=10V, Author="CERN DEM JLC", Component Type=Standard, ComponentHeight=1.8mm, CreateDate=23.01.2018, HelpURL=\\cern.ch\dfs\Applications\Altium\Datasheets\CTE-LESR_AVX_TPS-AUTO.pdf, LatestRevisionDate=23.01.2018, Mounted=Yes, Part Description="Low ESR 1R4 Automotive Solid Tantalum Chip Capacitor", Part Number=CTE3216-18_4.7UF_10V_10%_AVX_TPSA475K010T1400, Pin Count=2, Sense=No, SMD=Yes, Socket=No, Status=Preferred
T_C9 T_C10 T_C11: library part CC0805_10UF_25V_10%_X5R, "Non-polarised capacitor", Case=0805, MANUFACTURER=GENERIC, Manufacturer1 ComponentHeight=0.95mm, Manufacturer1 Example=MURATA, Manufacturer1 Part Number=GRM219R61E106KA12D, Tolerance=±10%, Voltage=25V, Author="CERN DEM JLC", Component Type=Standard, CreateDate=25.10.2012, HelpURL=\\cern.ch\dfs\Applications\Altium\Datasheets\CC0805_X5R_MURATA_GRM.pdf, LatestRevisionDate=06.09.2016, Manufacturer Part Number=CC0805_10UF_25V_10%_X5R, Mounted=Yes, Part Description="SMD Multilayer Chip Ceramic Capacitor", Part Number=CC0805_10UF_25V_10%_X5R, Pin Count=2, Sense=No, SMD=Yes, Socket=No, Status=Preferred, TC=X5R
T_C12: library part CC0402_22PF_50V_5%_C0G, "Non-polarised capacitor", Case=0402, MANUFACTURER=GENERIC, Manufacturer1 ComponentHeight=0.55mm, Manufacturer1 Example=KEMET, Manufacturer1 Part Number=C0402C220J5GACTU, Tolerance=±5%, Voltage=50V, Author="CERN DEM JLC", Component Type=Standard, CreateDate=2007-12-03, HelpURL="\\cern.ch\dfs\Applications\Altium\Datasheets\CC0402_C0G_KEMET_(Commercial Grade).pdf", LatestRevisionDate=2007-12-03, Manufacturer Part Number=CC0402_22PF_50V_5%_C0G, Mounted=Yes, Part Description="SMD Multilayer Chip Ceramic Capacitor", Part Number=CC0402_22PF_50V_5%_C0G, Pin Count=2, Sense=No, SMD=Yes, Socket=No, Status=Preferred, TC=C0G/NP0
T_C13 T_C16 T_C17 T_C18 T_C19: library part CC0402_10NF_50V_5%_X7R, "Non-polarised capacitor", Case=0402, MANUFACTURER=GENERIC, Manufacturer1 ComponentHeight=0.55mm, Manufacturer1 Example=KEMET, Manufacturer1 Part Number=C0402C103J5RAC, Tolerance=±5%, Voltage=50V, Author="CERN DEM BC", Component Type=Standard, CreateDate=15.07.2020, HelpURL=\\cern.ch\dfs\Applications\Altium\Datasheets\CC0402_X7R_KEMET.pdf, LatestRevisionDate=15.07.2020, Manufacturer Part Number=CC0402_10NF_50V_5%_X7R, Mounted=Yes, Part Description="SMD Multilayer Chip Ceramic Capacitor", Part Number=CC0402_10NF_50V_5%_X7R, Pin Count=2, Sense=No, SMD=Yes, Socket=No, Status=Preferred, TC=X7R
T_D1 T_D2 T_D3: library part CMP-004-00037-2, "Diode TVS Quint Common Anode Uni-Dir 3.3V 40W 6-Pin SLP EP T/R", Max Operating Temperature=125°C, Min Operating Temperature=-55°C, Mounting Technology="Surface Mount", Pins=6
T_D5: "Zener Diode", Case=DO-214AA, MANUFACTURER="FAIRCHILD SEMICONDUCTOR", Power=600W, Voltage=12V, Author="CERN DEM JLC", Bonding=No, Component Type=Standard, ComponentHeight=2.65mm, CreateDate=10.04.2013, Device=SMBJ12A, HelpURL=\\cern.ch\dfs\Applications\Altium\Datasheets\SMBJ.pdf, LatestRevisionDate=10.04.2013, Manufacturer Part Number=SMBJ12A, Mounted=Yes, PackageDescription="DO-214-AA/SMB Diode, Molded Body; 5.34mm L X 3.625mm W X 2.65mm H, IPC Medium Density", Part Description="Uni-Directional Transient Voltage Suppressor Diode", Part Number=SMBJ12A, Pin Count=2, PressFit=No, Sense=No, SMD=Yes, Socket=No
T_D6: "Schottky Diode", Case=SOD-523F, MANUFACTURER=COMCHIP, Power=500mA, Voltage=20V, Author="CERN DEM HF", Bonding=No, Component Type=Standard, ComponentHeight=1mm, CreateDate=13.10.2023, Device=CDBU0520-HF, HelpURL=\\cern.ch\dfs\Applications\Altium\Datasheets\CDBU0520-HF.pdf, LatestRevisionDate=13.10.2023, Manufacturer Part Number=CDBU0520-HF, Mounted=Yes, PackageDescription="Small Outline Diode Flat Lead (SOD-523F), Body; 1.80mm L X 1mm W X 0.85mm H", Part Description="20V Surface mount Schottky Barrier Diode", Part Number=CDBU0520-HF, Pin Count=2, PressFit=No, Sense=No, SMD=Yes, Socket=No
T_FL1: library part FIL_MURATA_BNX022-01L, "Block Type EMIFIL (LC Combined)", MANUFACTURER=MURATA, Manufacturer Part Number=BNX022-01L, Resistance=0.5R, Author="CERN DEM JLC", Component Type=Standard, ComponentHeight=3.3mm, CreateDate=10.10.2012, HelpURL=\\cern.ch\dfs\Applications\Altium\Datasheets\FIL_MURATA_BNX022-01L.pdf, LatestRevisionDate=10.10.2012, Mounted=Yes, Part Description="Block Type EMIFIL (LC Combined) SMD Type, BNX02* Series", Part Number=FIL_MURATA_BNX022-01L, Pin Count=2, Sense=No, SMD=Yes, Socket=No, Status=None
T_IC1: "150-mA, 30-V, 1-µA IQ Voltage Regulators with Enable", Case=SOT23-5, MANUFACTURER="TEXAS INSTRUMENTS", Author="CERN DEM JLC", Bonding=No, Component Type=Standard, ComponentHeight=1.45mm, CreateDate=17.03.2011, Device=TPS70933DBV, HelpURL=\\cern.ch\dfs\Applications\Altium\Datasheets\TPS709.pdf, LatestRevisionDate=17.03.2011, Manufacturer Part Number=TPS70933DBV, Mounted=Yes, PackageDescription="SOT23, 0.95mm Pitch; 5 Pin, 1.60mm W X 2.90mm L X 1.45mm H body, IPC Medium Density", Part Description="3.3V, 150-mA, 30-V, 1-µA IQ Voltage Regulators with Enable", Part Number=TPS70933DBV, Pin Count=5, PressFit=No, Sense=No, SMD=Yes, Socket=No
T_IC2: "1.7V-5.5V, 2K I2C Serial EEPROM With EUI-48 Node Identity", Case=SOT23-5, MANUFACTURER="MICROCHIP TECHNOLOGY", Author="CERN DEM MR", Bonding=No, Component Type=Standard, ComponentHeight=1.45mm, CreateDate=31.03.2016, Device=24AA02E48T-I/OT, HelpURL=\\cern.ch\dfs\Applications\Altium\Datasheets\24AA02E48T-I-OT.pdf, LatestRevisionDate=31.03.2016, Manufacturer Part Number=24AA02E48T-I/OT, Mounted=Yes, PackageDescription="SOT, 0.95mm pitch; 5 pin, 1.60mm W X 2.90mm L X 1.45mm H body, IPC Medium Density", Part Description="1.7V-5.5V, 2K I2C Serial EEPROM with EUI-48 Node Identity", Part Number=24AA02E48T-I/OT, Pin Count=5, PressFit=No, Sense=No, SMD=Yes, Socket=No
T_IC3: "1.7V-5.5V, 2K I2C™ Serial EEPROMs with EUI-48™ Node Identity", Case=SOIC8, MANUFACTURER="MICROCHIP TECHNOLOGY", Author="CERN DEM MR", Bonding=No, Component Type=Standard, ComponentHeight=1.75mm, CreateDate=19.07.2016, Device=24AA025E48-I/SN, HelpURL=\\cern.ch\dfs\Applications\Altium\Datasheets\24AA025E48-I-SN.pdf, LatestRevisionDate=19.07.2016, Manufacturer Part Number=24AA025E48-I/SN, Mounted=Yes, PackageDescription="SOIC 8, Pitch 1.27mm - Body 4x5mm, IPC Medium Density", Part Description="1.7V-5.5V, 2K I2C™ Serial EEPROMs with EUI-48™ Node Identity", Part Number=24AA025E48-I/SN, Pin Count=8, PressFit=No, Sense=No, SMD=Yes, Socket=No
T_IC4 T_IC6: library part CMP-010-00652-2, "Serial Switch/Digital Sensor, 9 Bit(s), 3Cel, Square, 8 Pin, Surface Mount", Max Operating Temperature=125°C, Max Supply Voltage=5.5V, Min Operating Temperature=-55°C, Min Supply Voltage=2.7V, Mounting Technology="Surface Mount", Pins=8, RoHS Compliant=Yes, Sensor Type="TEMPERATURE SENSOR,SWITCH/DIGITAL OUTPUT,SERIAL"
T_IC7: "Low Quiescent Current, Programmable-Delay Supervisory Circuit", Case=SOT23-6, MANUFACTURER="TEXAS INSTRUMENTS", Manufacturer Part Number=TPS3808G01DBV, Author="CERN DEM JLC", Bonding=No, Component Type=Standard, ComponentHeight=1.45mm, CreateDate=22.10.2008, Device=TPS3808G01DBVT, HelpURL=\\cern.ch\dfs\Applications\Altium\Datasheets\TPS3808G01DBVT.pdf, LatestRevisionDate=10.06.2022, Mounted=Yes, PackageDescription="SOT, 0.95mm Pitch; 6 Pin, 1.60mm W X 2.90mm L X 1.45mm H body, IPC Medium Density", Part Description="Adjustable Low Quiescent Current, Programmable-Delay Supervisory Circuit", Part Number=TPS3808G01DBVT, Pin Count=6, PressFit=No, Sense=No, SMD=Yes, Socket=No
T_IC8 T_IC9: library part CMP-015-00014-1, "Dual Supply 2-Bit Voltage Translator/Buffer/Repeater Isolator for I2C Applications", MANUFACTURER=Onsemi, Max Operating Temperature=85°C, Max Supply Voltage=5.5V, Min Operating Temperature=-40°C, Min Supply Voltage=1.65V, Manufacaturer Part Number=FXMA2102UMX, Mounting Technology="Surface Mount", Pins=8
T_J1: library part 3M_N2530-6002RB, "Connector 30 Male", MANUFACTURER=3M, Manufacturer Part Number=N2530-6002RB, Author="CERN DEM JLC", Component Type=Standard, ComponentHeight=10.03mm, CreateDate=11.02.2009, Family="Header 30", HelpURL=\\cern.ch\dfs\Applications\Altium\Datasheets\3M_N2530-6002RB.pdf, LatestRevisionDate=11.08.2009, Mounted=Yes, Part Description="30 Contacts - Straight .100'' x .100'' Low Profile Four-Wall Header, 2500 Series", Part Number=3M_N2530-6002RB, Pin Count=30, PressFit=No, Sense=No, SMD=No, Socket=No, Status=None
T_J4: library part AMPHENOL_10052825-101LF, "72 Contacts Header, 6 Columns, 4 Pairs per Column", MANUFACTURER=AMPHENOL, Manufacturer Part Number=10052825-101LF, Author="CERN DEM MR", ClassName=Overlapping, Component Type=Standard, ComponentHeight=15.35mm, ComponentLink1Description=Application, ComponentLink1URL=\\cern.ch\dfs\Applications\Altium\Datasheets\AMPHENOL_10052825-101LF_Application.pdf, CreateDate=19/02/2018, Family="AirMax VS", HelpURL=\\cern.ch\dfs\Applications\Altium\Datasheets\AMPHENOL_10052825-101LF.pdf, LatestRevisionDate=19/02/2018, Mounted=Yes, Part Description="72 Contacts, 2mm Pitch, 6 Columns, 4 Pairs per Column, 4 Walls, Right Angle Header", Part Number=AMPHENOL_10052825-101LF, Pin Count=72, PressFit=Yes, Sense=No, SMD=No, Socket=No, Status=None
T_J6: library part MOLEX_39-30-0040, "Connector 4 Male", MANUFACTURER=MOLEX, Manufacturer Part Number=39-30-0040, Author="CERN DEM JLC", Component Type=Standard, ComponentHeight=11.4mm, CreateDate=2018-10-02, Family="Mini-Fit Jr.™", HelpURL=\\cern.ch\dfs\Applications\Altium\Datasheets\MOLEX_39-30-0040.pdf, LatestRevisionDate=2018-10-02, Mounted=Yes, Part Description="4.20mm (.165\") Pitch Mini-Fit Jr. Header, Dual Row, Right Angle with Snap-in Plastic Peg PCB Lock, 4 Circuits", Part Number=MOLEX_39-30-0040, Pin Count=4, PressFit=No, Sense=No, SMD=No, Socket=No, Status=None
T_LD4: library part LED_KINGBRIGHT_KPH-1608CGCK, "LED Green 1C 2A", MANUFACTURER=KINGBRIGHT, Manufacturer Part Number=KPH-1608CGCK, Author="CERN DEM JLC", Bonding=No, Color=Green, Component Type=Standard, ComponentHeight=0.65mm, CreateDate=03.07.2017, HelpURL=\\cern.ch\dfs\Applications\Altium\Datasheets\LED_KINGBRIGHT_KPH-1608CGCK.pdf, LatestRevisionDate=03.07.2017, Mounted=Yes, PackageDescription="SMT Green LED, Case 0603, Body L 1.6 x W 0.8mm H 0.65mm", Part Description="SMD Green LED, Case 1.6mmX0.8mm(0603), 0.65mm Thickness", Part Number=LED_KINGBRIGHT_KPH-1608CGCK, Pin Count=2, PressFit=No, Sense=No, SMD=Yes, Socket=No
T_R1 T_R6: library part R0402_1K6_1%_0.0625W_100PPM, "Resistor - 1%", Case=0402, MANUFACTURER=GENERIC, Manufacturer1 ComponentHeight=0.4mm, Manufacturer1 Example="YAGEO PHYCOMP", Manufacturer1 Part Number=232270671602L, Power=0.0625W, Tolerance=±1%, Author="CERN DEM JLC", Component Type=Standard, CreateDate=03.12.2007, HelpURL=\\cern.ch\dfs\Applications\Altium\Datasheets\R0402_Phycomp_RC0402.pdf, LatestRevisionDate=17.10.2012, Manufacturer Part Number=R0402_1K6_1%_0.0625W_100PPM, Mounted=Yes, Part Description="General Purpose Thick Film Chip Resistor", Part Number=R0402_1K6_1%_0.0625W_100PPM, Pin Count=2, PressFit=No, Sense=No, SMD=Yes, Socket=No, Status="Not Recommended", TC=±100ppm/°C
T_R3 T_R8: library part R0603_10K_1%_0.1W_100PPM, "Resistor - 1%", Case=0603, MANUFACTURER=GENERIC, Manufacturer1 ComponentHeight=0.55mm, Manufacturer1 Example="NIC COMPONENT", Manufacturer1 Part Number=NRC06F1002TRF, Power=0.1W, Tolerance=±1%, Author="CERN DEM JLC", Component Type=Standard, CreateDate=03.12.2007, HelpURL=\\cern.ch\dfs\Applications\Altium\Datasheets\R0603_NIC_NRC.pdf, LatestRevisionDate=13.03.2008, Manufacturer Part Number=R0603_10K_1%_0.1W_100PPM, Mounted=Yes, Part Description="General Purpose Thick Film Chip Resistor", Part Number=R0603_10K_1%_0.1W_100PPM, Pin Count=2, PressFit=No, Sense=No, SMD=Yes, Socket=No, Status=Preferred, TC=±100ppm/°C
T_R13 T_R14 T_R15 T_R16 T_R17 T_R18: library part R0402_22R_1%_0.0625W_100PPM, "Resistor - 1%", Case=0402, MANUFACTURER=GENERIC, Manufacturer1 ComponentHeight=0.4mm, Manufacturer1 Example="YAGEO PHYCOMP", Manufacturer1 Part Number=232270672209L, Power=0.0625W, Tolerance=±1%, Author="CERN DEM JLC", Component Type=Standard, CreateDate=03.12.2007, HelpURL=\\cern.ch\dfs\Applications\Altium\Datasheets\R0402_Phycomp_RC0402.pdf, LatestRevisionDate=17.10.2012, Manufacturer Part Number=R0402_22R_1%_0.0625W_100PPM, Mounted=Yes, Part Description="General Purpose Thick Film Chip Resistor", Part Number=R0402_22R_1%_0.0625W_100PPM, Pin Count=2, PressFit=No, Sense=No, SMD=Yes, Socket=No, Status="Not Recommended"
T_R19: library part R0402_200R_1%_0.0625W_100PPM, "Resistor - 1%", Case=0402, MANUFACTURER=GENERIC, Manufacturer1 ComponentHeight=0.4mm, Manufacturer1 Example="YAGEO PHYCOMP", Manufacturer1 Part Number=232270672001L, Power=0.0625W, Tolerance=±1%, Author="CERN DEM JLC", Component Type=Standard, CreateDate=2007-12-03, HelpURL=\\cern.ch\dfs\Applications\Altium\Datasheets\R0402_Phycomp_RC0402.pdf, LatestRevisionDate=2012-10-17, Manufacturer Part Number=R0402_200R_1%_0.0625W_100PPM, Mounted=Yes, Part Description="General Purpose Thick Film Chip Resistor", Part Number=R0402_200R_1%_0.0625W_100PPM, Pin Count=2, PressFit=No, Sense=No, SMD=Yes, Socket=No, Status="Not Recommended", TC=±100ppm/°C
T_R26: library part R0805_1M1_1%_0.125W_100PPM, "Resistor - 1%", Case=0805, MANUFACTURER=GENERIC, Manufacturer1 ComponentHeight=0.6mm, Manufacturer1 Example="NIC COMPONENT", Manufacturer1 Part Number=NRC10F1104TRF, Author="CERN DEM JLC", Component Type=Standard, CreateDate=03/12/2007, HelpURL=\\cern.ch\dfs\Applications\Altium\Datasheets\R0805_NIC_NRC.pdf, LatestRevisionDate=13/03/2008, Manufacturer Part Number=R0805_1M1_1%_0.125W_100PPM, Mounted=Yes, Part Description="General Purpose Thick Film Chip Resistor", Part Number=R0805_1M1_1%_0.125W_100PPM, Pin Count=2, PressFit=No, Sense=No, SMD=Yes, Socket=No, Status=Preferred
T_R27 T_R28: library part "R0805_10M_1%_0.125W_100PPM_VISHAY_CRCW e3", "Resistor - 1%", Case=0805, MANUFACTURER="VISHAY DALE", Manufacturer Part Number=CRCW080510M0FKEA, Power=0.125W, Tolerance=±1%, Author="CERN DEM BC", Component Type=Standard, ComponentHeight=0.5mm, CreateDate=2019-11-12, HelpURL="\\cern.ch\dfs\Applications\Altium\Datasheets\R0805_VISHAY_CRCW e3.pdf", LatestRevisionDate=2019-11-12, Mounted=Yes, Part Description="150V, Standard Thick Film Chip Resistor", Part Number="R0805_10M_1%_0.125W_100PPM_VISHAY_CRCW e3", Pin Count=2, PressFit=No, Sense=No, SMD=Yes, Socket=No, Status=None, TC=±100ppm/°C
T_T1 T_T2 T_T3 T_T4 T_T5: "N-CHANNEL MOSFET WITH DIODE", Case=SOT23-3, MANUFACTURER="ON SEMICONDUCTOR", Manufacturer Part Number=BSS138L, Author="CERN DEM JLC", Bonding=No, Component Type=Standard, ComponentHeight=1.11mm, CreateDate=23.03.2009, Device=BSS138LT1G, HelpURL=\\cern.ch\dfs\Applications\Altium\Datasheets\BSS138LT1G.pdf, LatestRevisionDate=25.05.2022, Mounted=Yes, PackageDescription="SOT23, 0.95mm Pitch; 3 Pin, 1.40mm W X 3.00mm L X 1.10mm H body, IPC Medium Density", Part Description="50V, 200mA N-Channel Enhancement Mode Field-Effect Transistor", Part Number=BSS138LT1G, Pin Count=3, PressFit=No, Sense=No, SMD=Yes, Socket=No
TP1 TP2 TP3 TP5 TP16 TP18 TP22 TP23: library part SMD_PAD_1.27X1.27MM, Author="CERN DEM JLC", Component Type="Standard (No BOM)", ComponentHeight=0mm, CreateDate=12.01.2008, Family="Test Point", HelpURL=Undefined, LatestRevisionDate=12.01.2008, Mounted=No, PackageDescription="1.27mm x 1.27mm PCB Copper Area (SMD Test Point)", Part Description="1.27mm x 1.27mm PCB Copper Area (SMD Test Point)", Part Number=SMD_PAD_1.27X1.27MM, Pin Count=1, Sense=No, SMD=Yes, Socket=No, Status=None
TR1A TR1B TR2A TR2B: "1:1 CORE & WIRE Transformer, 10 - 6000 MHz, 50Ω", MANUFACTURER=Mini-Circuits, Power=0.2W, Authors=skuchars, Component Type=Standard, ComponentHeight=4.06mm, CreateDate=28.09.2025, HelpURL=https://www.minicircuits.com/pdfs/TCM1-63AX+.pdf, LatestRevisionDate=28.09.2025, Manufacturer Part Number=TCM1-63AX+, Mounted=Yes, Part Description="1:1 CORE & WIRE Transformer, 10 - 6000 MHz, 50Ω", Part Number=TCM1-63AX+, Pin Count=6, Sense=No, SMD=Yes, Socket=No, Status=None
U1: library part CMP-0192-00056-1, "PWM Fan Speed Controller with Auto-Shutdown and FanSense Technology, 8-Pin SOIC, Industrial Temperature", Code_IPC=SOIC127P600-8, DatasheetVersion="revC, Oct-2002", PackageDescription="8-Lead Plastic Small Outline (OA) - Narrow, 3.90mm Body [SOIC]", PackageReference=SOIC-OA8, PackageVersion="revBB, Aug-2009"
U2: library part CMP-0188-01365-1, "12-Bit Quad Digital-to-Analog Converter with EEPROM Memory, 10-Pin MSOP, Extended Temperature", ComponentLink1Description="Manufacturer URL", ComponentLink1URL=http://www.microchip.com/, ComponentLink2Description=Datasheet, ComponentLink2URL=http://ww1.microchip.com/downloads/en/DeviceDoc/22187E.pdf, ComponentLink3Description="Package Specification", ComponentLink3URL=http://www.microchip.com/stellent/groups/techpub_sg/documents/packagingspec/en012702.pdf, DatasheetVersion="revE, Oct-2010", PackageDescription="10-Lead Plastic Micro Small Outline Package (UN) [MSOP]", PackageReference=MSOP-UN10, PackageVersion="revBB, Aug-2009"
W1: library part SAMTEC_HTSW-105-23-L-S, "5 Mini Wire-Wrap Contact Strip Header", MANUFACTURER=SAMTEC, Manufacturer Part Number=HTSW-105-23-L-S, Author="CERN DEM JLC", Component Type=Standard, ComponentHeight=8.38mm, CreateDate=22.02.2018, Family="Header 5", HelpURL=\\cern.ch\dfs\Applications\Altium\Datasheets\SAMTEC_HTSW-105-23-L-S.pdf, LatestRevisionDate=22.02.2018, Mounted=Yes, Part Description="5 Contacts, Pitch 2.54mm, Single Row  Through Mount Straight Header (Post Lead 5.84mm, Tail Lead 2.92mm, Insulator 2.54mm)", Part Number=SAMTEC_HTSW-105-23-L-S, Pin Count=5, PressFit=No, Sense=No, SMD=No, Socket=No, Status=Preferred, Status Comment="High Temperature"
WASHER2 WASHER4 WASHER6 WASHER8: library part Keystone_7687, "SMA_Shoulder Washer", MANUFACTURER="custom 3D", Author=GK, Component Type=Mechanical, ComponentHeight=1.91mm, CreateDate=28.01.2016, HelpURL=\\cern.ch\dfs\Applications\Altium\Datasheets\AAVID-THERMALLOY_7721-7PPSG.pdf, LatestRevisionDate=28.01.2016, Manufacturer Part Number="custom 3D", Mounted=Yes, PackageDescription="Polyphenylene Sulfide PPS Shoulder Washer", Part Description="Polyphenylene Sulfide PPS Shoulder Washer", Part Number="custom 3D", Pin Count=0, PressFit=No, Sense=No, SMD=No, Socket=No, Status=None

## Free pads (board coordinates)
  round 6 hole 3.2: 0(156.5,6) 0(156.5,94)
  round 3.2 hole 3.2: 2(210,64) 3(210,54)

## Via types
v1: diameter 0.5, hole 0.2, L1 to L4, tented both sides, 1301 vias
v2: diameter 0.6, hole 0.3, L1 to L4, tented both sides, 443 vias
v3: diameter 0.8, hole 0.5, L1 to L4, tented both sides, 25 vias
v4: diameter 0.5, hole 0.2, L1 to L4, 8 vias
v5: diameter 1.27, hole 0.711, L1 to L4, tented both sides, 4 vias

## Nets (pads, with @x,y where several pads share a name; then routed paths per layer and width w, separated by ;. In a path a pad name is that pad's centre, name@x,y a point inside that pad or via, vN(x,y) a via of type N, cw(c..) or ccw(c..) an arc to the next point about the centre after c; other vN are vias at no path point)
ADC_IN0: IC10A.4 IC12A.1 IC16.10 R32A.1 | length 160.4
  L1 w0.152: R32A.1@37,75.06 37.02,75.06 37.555,75.595 37.555,75.701 37.877,76.022 39.728,76.022 40.007,75.743 40.913,75.743 41.137,75.519 IC12A.1@41.286,75.519 ; IC12A.1@41.63,75.5 41.835,75.295 41.835,73.638 42.086,73.387 v2(45.762,73.387) 48.859,73.387 49.68,72.566 56.312,72.566 57.002,71.876 66.481,71.876 68.384,73.779 86.634,73.779 87.433,74.578 97.757,74.578 97.76,74.575 97.925,74.575 99.258,73.242 99.258,73.19 102.519,69.929 v1(107.942,69.929) ; v2(45.762,74.423) 45.762,74.35 46.942,75.53 IC10A.4@47.09,75.53 ; v1(117.486,21.631) 117.486,33.173 117.66,33.347 117.66,61.125 118.1,61.565 v1(118.1,68.825) ; v1(137.598,20.878) 137.719,20.878 137.834,20.992 IC16.10@138.653,20.992
  L3 w0.152: v2(45.762,73.387) v2(45.762,74.423) ; v1(107.942,69.929) 108.008,69.863 108.325,69.863 110.248,67.94 114.147,67.94 115,68.793 118.068,68.793 v1(118.1,68.825) ; v1(117.486,21.631) 117.545,21.572 127.776,21.572 128.205,22 133.914,22 134.922,20.992 137.285,20.992 137.314,20.964 137.513,20.964 v1(137.598,20.878)
ADC_IN4: IC10B.4 IC12B.1 IC16.14 R32B.1 | length 127.5
  L1 w0.152: R32B.1@37,38.06 37.02,38.06 37.555,38.595 37.555,38.701 37.877,39.022 39.728,39.022 40.007,38.743 41.007,38.743 41.25,38.5 41.63,38.5 41.835,38.295 41.835,37.021 43.289,35.566 45.866,35.566 ; v1(45.864,36.299) 45.866,36.297 45.866,35.566 ; v1(45.866,37.556) 46.84,38.53 IC10B.4@47.09,38.53 ; v1(99.814,36.002) 99.749,36.002 98.176,37.575 97.76,37.575 97.646,37.689 87.543,37.689 86.634,36.779 68.384,36.779 66.587,34.982 56.896,34.982 56.312,35.566 45.866,35.566 ; v1(128.979,21.086) 129.045,21.153 129.045,21.341 129.053,21.349 129.053,28.145 129.043,28.155 129.043,29.27 129.053,29.281 129.053,29.916 128.869,30.101 128.869,30.868 129.1,31.099 v1(129.1,31.863) ; v1(139.716,17.928) 139.798,18.01 139.798,18.352 139.853,18.406 IC16.14@139.853,19.292
  L3 w0.152: v1(45.864,36.299) 45.866,36.301 v1(45.866,37.556) ; v1(99.814,36.002) 99.777,35.966 99.777,35.623 99.988,35.412 100.235,35.412 102.694,32.953 102.985,32.953 103.028,32.911 107.985,32.911 109.151,31.745 109.499,31.745 110.068,31.175 115.175,31.175 115.785,31.785 119.895,31.785 119.933,31.747 121.708,31.747 121.825,31.863 v1(129.1,31.863) ; v1(128.979,21.086) 129.011,21.119 131.815,21.119 132.289,20.644 135.756,20.644 138.48,17.92 139.708,17.92 v1(139.716,17.928)
BGA0: T_D3.3 T_J4.C3 T_R13.2 | length 35.1
  L1 w0.152: T_R13.2@216.059,34.588 216.059,33.571 216.25,33.38 v1(216.25,32.25) ; T_D3.3@218.246,20.743 218.246,19.837 218.51,19.573 v1(218.51,18)
  L3 w0.152: T_J4.C3@215.139,8.5 215.892,7.747 218.251,7.747 218.792,8.288 218.792,17.695 218.51,17.977 v1(218.51,18) 217.484,18 216.25,19.234 v1(216.25,32.25)
BGA1: T_D3.1 T_J4.F3 T_R14.2 | length 36.6
  L1 w0.152: T_R14.2@215.809,30.985 215.824,31 v1(217.214,31) ; v1(217.214,19.228) 217.214,20.711 T_D3.1@217.246,20.743
  L3 w0.152: T_J4.F3@210.939,8.5 212.061,7.378 218.878,7.378 219.25,7.75 219.25,18.291 218.914,18.627 217.814,18.627 v1(217.214,19.228) 217.214,19.294 v1(217.214,31)
BGA2: T_D3.6 T_J4.I3 T_R16.2 | length 36.4
  L1 w0.152: T_R16.2@215.809,27.58 216.904,27.58 219,25.484 219,24.58 218.781,24.361 v1(218.781,24.317) ; T_D3.6@217.246,22.263 217.252,22.27 217.252,22.717 217.705,23.17 v1(218.757,23.17)
  L4 w0.152: T_J4.I3@206.739,8.5 207.492,7.747 218.251,7.747 218.963,8.459 218.963,21.179 219.099,21.315 219.099,21.691 218.789,22 218.789,22.483 218.8,22.494 v1@218.8,23.17 ; v1(218.757,23.17) v1@218.8,23.17 ; v1(218.781,24.317) 218.8,24.298 v1@218.8,23.17
BGA3: T_D3.4 T_J4.L3 T_R18.2 | length 37.7
  L1 w0.152: T_R18.2@215.809,23.785 219.121,23.785 219.21,23.696 219.21,22.263 T_D3.4@218.246,22.263